# EAGLE board USBPOVToy.v1a (EAGLE 5.11)
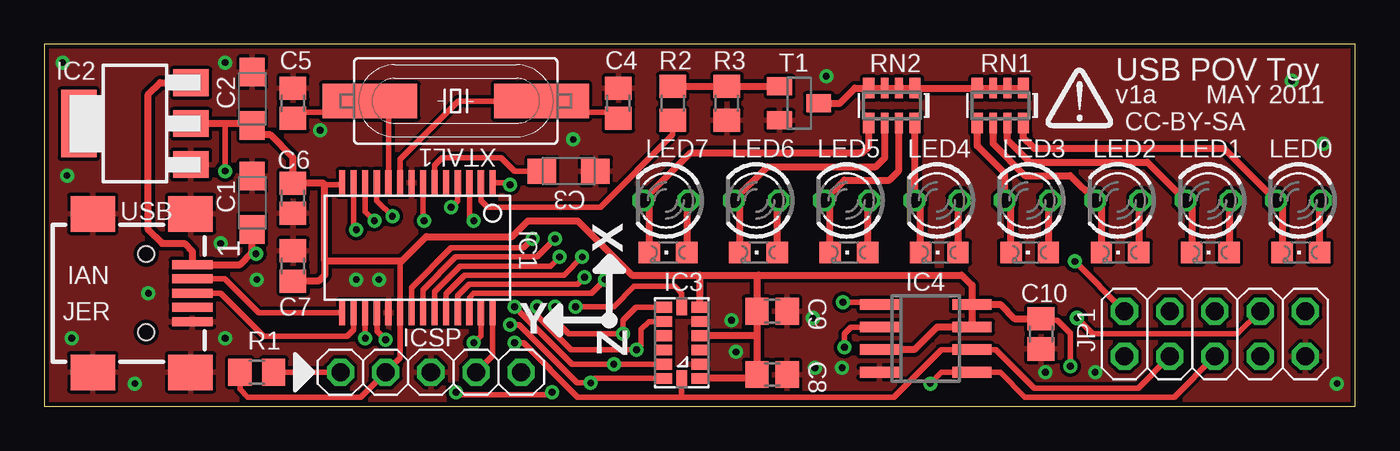
[diagram p0: board, top side]
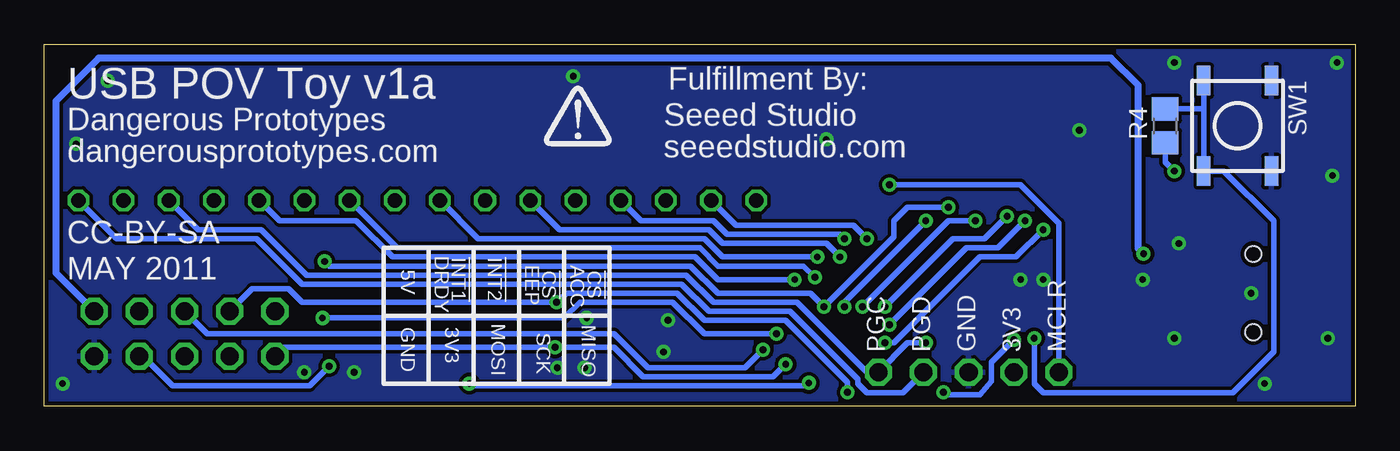
[diagram p1: board, bottom side, seen from below]

Size 73.66 x 20.32 mm. Coordinates in mm from the lower left corner, seen from the top.
Outline: 0,0 73.66,0 73.66,20.32 0,20.32 0,0
Copper layers (1*16): Top 0.035mm / dielectric 1.5mm / Bottom 0.035mm
Design rules "default *": minimum track width 12mil, minimum drill 15mil, track to track 8mil, track to pad 8mil, pad to pad 6mil, via to via 8mil, smd to smd 6mil, copper to edge 10mil, drill to drill 8mil, minimum pad ring 8mil, minimum via ring 8mil, stop-mask expansion 4mil, vias tented up to drill 25mil, thermal gap 8mil

## Footprints (pad centres in the part's own frame; a part is rotated, then mirrored left to right if it is on the bottom)
SMC_A = smd 1.6 x 1.4: + -1.5,0; - 1.5,0
C805 = smd 1.3 x 1.5: 1 -0.85,0; 2 0.85,0
SSOP28 = smd 0.348 x 1.397: 1 -4.225,-3.656; 2 -3.575,-3.656; 3 -2.925,-3.656; 4 -2.275,-3.656; 5 -1.625,-3.656; 6 -0.975,-3.656; 7 -0.325,-3.656; 8 0.325,-3.656; 9 0.975,-3.656; 10 1.625,-3.656; 11 2.275,-3.656; 12 2.925,-3.656; 13 3.575,-3.656; 14 4.225,-3.656; 15 4.225,3.656; 16 3.575,3.656; 17 2.925,3.656; 18 2.275,3.656; 19 1.625,3.656; 20 0.975,3.656; 21 0.325,3.656; 22 -0.325,3.656; 23 -0.975,3.656; 24 -1.625,3.656; 25 -2.275,3.656; 26 -2.925,3.656; 27 -3.575,3.656; 28 -4.225,3.656
SOT223 = smd 1.5 x 2: 1 -2.3,-3.15; 2 0,-3.15; 3 2.3,-3.15 | smd 3.8 x 2: 4 0,3.15
LGA-14 = smd 0.6 x 0.9: 1 -2,-1; 2 -1.2,-1; 3 -0.4,-1; 4 0.4,-1; 5 1.2,-1; 6 2,-1; 8 2,1; 9 1.2,1; 10 0.4,1; 11 -0.4,1; 12 -1.2,1; 13 -2,1 | smd 0.9 x 0.6: 7 2,0; 14 -2,0
SO-08 = smd 0.6 x 2.2: 1 -1.905,-2.6; 2 -0.635,-2.6; 3 0.635,-2.6; 4 1.905,-2.6; 5 1.905,2.6; 6 0.635,2.6; 7 -0.635,2.6; 8 -1.905,2.6
1X05 = drill 1.016 octagon: 1 -5.08,0; 2 -2.54,0; 3 0,0; 4 2.54,0; 5 5.08,0
2X05 = drill 1.016 octagon: 1 -5.08,-1.27; 2 -5.08,1.27; 3 -2.54,-1.27; 4 -2.54,1.27; 5 0,-1.27; 6 0,1.27; 7 2.54,-1.27; 8 2.54,1.27; 9 5.08,-1.27; 10 5.08,1.27
LED-3MM = drill 0.813 octagon: A -1.27,0; K 1.27,0
LED-805 = smd 1.2 x 1.2: A 0,-1.05; C 0,1.05
R805 = smd 1.3 x 1.5: 1 -0.95,0; 2 0.95,0
RN8P-4R-CRA06S = smd 0.63 x 1.15: 1 -1.295,-0.975; 4 1.295,-0.975; 5 1.295,0.975; 8 -1.295,0.975 | smd 0.44 x 1.15: 2 -0.4,-0.975; 3 0.4,-0.975; 6 0.4,0.975; 7 -0.4,0.975
TACT_SWITCH_SMALL = smd 1.651 x 0.762: 1 -2.54,1.905; 2 2.54,1.905; 3 -2.54,-1.905; 4 2.54,-1.905
SOT23-BEC = smd 1 x 1.4: B -0.95,-1.1; C 0,1.1; E 0.95,-1.1
CONN_USB_MINI-B = smd 2 x 2.5: BODY@1 -4.45,2.5; BODY@2 4.45,2.5; BODY@3 4.45,-3; BODY@4 -4.45,-3 | smd 0.5 x 2.3: D+ 0,2.6; D- -0.8,2.6; GND 1.6,2.6; P4 0.8,2.6; VUSB -1.6,2.6 | hole 0.9: -2.2,0; 2.2,0
HC-49U = smd 5.334 x 1.93: 1 -4.826,0; 2 4.826,0

## Placement (x,y rotation side)
C1  10uF  [SMC_A]  11.68,11.43 90 top
C2  10uF  [SMC_A]  11.68,17.27 90 top
C3  10uF  [SMC_A]  29.46,13.21 0 top
C4  [C805]  32.26,17.02 90 top
C5  [C805]  13.97,17.02 90 top
C6  0.47uF  [C805]  13.97,11.68 270 top
C7  0.1uF  [C805]  13.97,7.87 90 top
C8  0.1uF  [C805]  40.89,1.78 0 top
C9  0.1uF  [C805]  40.89,5.33 0 top
C10  0.1uF  [C805]  56.01,4.06 270 top
IC1  PIC18FJ2X50SSOP  [SSOP28]  20.95,8.89 180 top
IC2  [SOT223]  5.08,15.88 90 top
IC3  MMA7455L  [LGA-14]  35.81,3.56 90 top
IC4  25AA080SN  [SO-08]  49.53,3.81 270 top
ICSP  [1X05]  21.72,1.91 0 top
JP1  [2X05]  65.79,4.06 0 top
LED0  [LED-3MM]  70.48,11.56 180 top
LED1  [LED-3MM]  65.41,11.56 180 top
LED2  [LED-3MM]  60.33,11.56 180 top
LED3  [LED-3MM]  55.24,11.56 180 top
LED4  [LED-3MM]  50.16,11.56 180 top
LED5  [LED-3MM]  45.09,11.56 180 top
LED6  [LED-3MM]  40.01,11.56 180 top
LED7  [LED-3MM]  34.92,11.56 180 top
LED8  [LED-805]  35.05,8.64 90 top
LED9  [LED-805]  40.13,8.64 90 top
LED10  [LED-805]  45.21,8.64 90 top
LED11  [LED-805]  50.29,8.64 90 top
LED12  [LED-805]  55.37,8.64 90 top
LED13  [LED-805]  60.45,8.64 90 top
LED14  [LED-805]  65.53,8.64 90 top
LED15  [LED-805]  70.61,8.64 90 top
R1  10k  [R805]  11.94,1.91 180 top
R2  1k  [R805]  35.31,17.02 270 top
R3  10k  [R805]  38.35,17.02 270 top
R4  10k  [R805]  10.67,15.75 90 bottom
RN1  [RN8P-4R-CRA06S]  53.72,16.89 180 top
RN2  [RN8P-4R-CRA06S]  47.62,16.89 180 top
SW1  [TACT_SWITCH_SMALL]  6.6,15.75 270 bottom
T1  [SOT23-BEC]  42.42,17.02 270 top
U$1  [DP_LOGO]  58.17,16.26 0 top
U$2  [DP_LOGO]  43.69,15.24 0 bottom
USB  CONN_USB  [CONN_USB_MINI-B]  5.71,6.35 270 top
XTAL1  20MHz  [HC-49U]  23.11,17.14 180 top

## Library data of the parts
C1-C10 IC2 LED0 LED1-LED15 R1-R4 RN1 RN2 SW1 T1 U$1 U$2 USB XTAL1 = dp_devices
IC1 = dp_devices; PIC18FJ2X50: PIC18FJ2X50
IC3 = jer_eagle
IC4 = microchip
ICSP = pinhead - Copy
JP1 = pinhead

## Nets
!MCLR: IC1.1 ICSP.1 R1.1
+3V3: C2.+ C6.1 C7.1 C8.1 C9.1 C10.1 IC1.14 IC1.20 IC2.2 IC3.1 IC3.4 IC3.6 IC4.3 IC4.7 IC4.8 ICSP.2 JP1.7 R1.2 R4.1
+5V: C1.+ IC2.3 JP1.10 USB.VUSB
D+: IC1.16 USB.D+
D-: IC1.15 USB.D-
GND: C1.- C2.- C3.- C4.2 C5.2 C6.2 C7.2 C8.2 C9.2 C10.2 IC1.8 IC1.19 IC2.1 IC3.2 IC3.5 IC4.4 ICSP.3 JP1.9 R3.2 SW1.1 SW1.2 T1.E USB.BODY@1 USB.BODY@2 USB.BODY@3 USB.BODY@4 USB.GND
N$1: C4.1 IC1.9 XTAL1.1
N$2: LED0.K LED15.C RN1.8
N$3: LED1.K LED14.C RN1.7
N$4: LED2.K LED13.C RN1.6
N$5: LED3.K LED12.C RN1.5
N$6: LED4.K LED11.C RN2.8
N$7: LED5.K LED10.C RN2.7
N$8: LED6.K LED9.C RN2.6
N$9: LED7.K LED8.C RN2.5
N$10: C3.+ IC1.6
N$12: C5.1 IC1.10 XTAL1.2
N$17: RN1.1 RN1.2 RN1.3 RN1.4 RN2.1 RN2.2 RN2.3 RN2.4 T1.C
N$18: R2.1 R3.1 T1.B
RA0: IC1.2 R2.2
RA1: IC1.3 IC3.8 JP1.8
RA2: IC1.4 IC3.7 JP1.2
RA3: IC1.5
RA5: IC1.7 IC3.9 JP1.6
RB0: IC1.21 LED7.A LED8.A
RB1: IC1.22 LED6.A LED9.A
RB2: IC1.23 LED5.A LED10.A
RB3: IC1.24 LED4.A LED11.A
RB4: IC1.25 LED3.A LED12.A
RB5: IC1.26 LED2.A LED13.A
RB6: IC1.27 ICSP.5 LED1.A LED14.A
RB7: IC1.28 ICSP.4 LED0.A LED15.A
RC0: IC1.11 IC3.12 IC4.2 JP1.1
RC1: IC1.12 IC3.13 IC4.5 JP1.5
RC2: IC1.13 IC3.14 IC4.6 JP1.3
RC6: IC1.17 R4.2 SW1.3 SW1.4
RC7: IC1.18 IC4.1 JP1.4

## Tracks (layer width: path | path; a pad name or v marks a point on that pad's centre or on a via)
!MCLR  (via drill 0.38)
  Top 0.305: R1.1 ICSP.1 | v26.16,12.45 26.06,12.55 IC1.1
  Bottom 0.305: v26.16,12.45 18.8,12.45 16.64,10.29 ICSP.1
+3V3  (via drill 0.38)
  Top 0.305: 15.75,12.45 16.63,12.45 IC1.14 | R1.2 10.99,0.95 11.43,0.51 17.78,0.51 ICSP.2 19.98,2.71 IC1.20 19.98,8.04 20.07,8.13 | 10.16,15.88 v10.16,13.21 | v57.66,2.23 57.66,4.09 56.92,4.83 56.19,4.83 C10.1
  Top 0.406: IC2.2 10.16,15.88 11.2,15.88 C2.+ 11.43,15.49 11.68,15.24 12.7,15.24 13.97,13.97 C6.1 15.66,12.53 15.75,12.45 15.75,8.13 | C7.1 15.41,7.02 15.75,7.37 15.75,8.13 | IC4.8 IC4.7 50.16,4.45 48.9,3.17 IC4.3 | C10.1 54.52,4.91 53.72,5.71 IC4.8 | 36.83,7.37 33.02,7.37 29.97,10.41 27.18,10.41 26.29,9.53 21.46,9.53 20.07,8.13 15.75,8.13 | 36.83,7.37 40.13,7.37 | 40.13,7.37 51.56,7.37 52.13,6.8 IC4.8 | IC3.6 36.81,7.35 36.83,7.37 | 40.13,7.37 40.04,7.28 C9.1 40.04,3.81 | 40.04,3.81 C8.1 39.82,1.56 IC3.1 | IC3.4 39.9,3.96 40.04,3.81
  Bottom 0.305: R4.1 10.67,13.72 v10.16,13.21 | JP1.7 68.1,2.79 66.45,1.14 58.75,1.14 v57.66,2.23
+5V  (via drill 0.38)
  Top 0.305: v11.89,8.56 11.86,8.56 11.68,8.64
  Top 0.406: C1.+ 11.68,8.64 11,7.95 USB.VUSB 8.31,8.7 7.87,9.14 6.6,9.14 5.84,9.91 5.84,17.53 6.49,18.18 IC2.3
  Bottom 0.406: JP1.10 73.03,7.49 73.03,17.14 70.61,19.56 13.72,19.56 12.19,18.03 12.19,8.87 v11.89,8.56
D+
  Top 0.305: USB.D+ 9.91,6.35 12.32,3.94 17.02,3.94 17.38,4.3 IC1.16
D-
  Top 0.305: USB.D- 10.12,7.15 12.04,5.23 IC1.15
GND  (via drill 0.38)
  other vias: 38.61,4.83 38.86,3.05 43.18,4.95 17.53,7.11 1.27,12.95 5.08,1.27 1.52,3.81 1.02,19.3 10.16,19.3 18.8,7.11 11.94,7.11 10.16,3.81 9.91,9.14 72.64,1.27 29.72,14.99 56.26,1.91 59.05,1.91 43.31,2.16 44.83,2.16 70.1,18.29 71.88,14.73 43.94,18.54 15.49,15.49 5.84,6.35
  pour Top: 0,0 73.66,0 73.66,20.32 0,20.32
  pour Bottom: 0,0 73.66,0 73.66,20.32 0,20.32
N$1
  Top 0.305: IC1.9 19.98,13.88 23.24,17.14 XTAL1.1 28.57,16.51 32,16.51 32.22,16.3 C4.1
N$2
  Top 0.406: LED15.C 69.56,11.21 LED0.K 66.29,14.48 55.63,14.48 55.02,15.09 RN1.8
N$3
  Top 0.406: LED14.C 64.48,11.21 LED1.K 61.98,13.72 55.37,13.72 54.12,14.97 RN1.7
N$4
  Top 0.406: LED13.C 59.4,11.21 LED2.K 57.66,12.95 55.12,12.95 53.32,14.75 RN1.6
N$5
  Top 0.406: LED12.C 54.32,11.21 LED3.K 53.98,13.08 52.43,14.63 RN1.5
N$6
  Top 0.406: LED11.C 49.24,11.21 LED4.K 48.92,11.58 RN2.8
N$7
  Top 0.406: LED10.C 44.16,11.21 LED5.K 44.96,12.7 47.5,12.7 48.02,13.23 RN2.7
N$8
  Top 0.406: LED9.C 39.08,11.21 LED6.K 40.64,13.46 46.74,13.46 47.23,13.95 RN2.6
N$9
  Top 0.406: LED8.C 34,11.21 LED7.K 36.32,14.22 45.97,14.22 46.33,14.58 RN2.5
N$10
  Top 0.305: IC1.6 21.93,13.55 22.35,13.97 25.65,13.97 26.42,13.21 C3.+
N$12
  Top 0.305: IC1.10 19.33,16.99 19.3,17.02 18.41,17.02 XTAL1.2 17.65,16.51 14.22,16.51 14.01,16.3 C5.1
N$17
  Top 0.406: T1.C 44.7,17.02 45.55,17.87 RN2.4 RN2.3 RN2.2 RN2.1 RN1.4 RN1.3 RN1.2 RN1.1
N$18
  Top 0.406: T1.B R3.1 R2.1
RA0
  Top 0.305: R2.2 35.31,15.24 31.24,11.18 24.89,11.18 24.53,11.54 IC1.2
RA1  (via drill 0.38)
  Top 0.305: v24.13,10.41 23.88,10.67 IC1.3 | v28.7,5.59 28.7,4.83 29.46,4.06 v32.51,4.06 32.51,4.83 33.24,5.56 IC3.8 | JP1.8 67.06,4.06 58.93,4.06 v58.04,4.95
  Bottom 0.305: v28.7,5.59 28.7,5.84 v24.13,10.41 | v32.51,4.06 36.58,4.06 38.35,5.84 43.56,5.84 44.45,4.95 v58.04,4.95
RA2  (via drill 0.38)
  Top 0.305: IC1.4 23.23,11.55 v22.86,11.18 | v29.84,5.59 32,5.59 33.15,6.73 35.43,6.73 35.81,6.35 IC3.7 | v57.91,8.13 JP1.2
  Bottom 0.305: v22.86,11.18 25.15,11.18 25.91,10.41 25.91,9.53 v29.84,5.59 30.61,6.35 35.81,6.35 37.34,7.87 57.66,7.87 v57.91,8.13
RA5  (via drill 0.38)
  Top 0.305: v27.69,5.59 27.69,5.08 29.59,3.17 v33.27,3.17 33.53,3.43 33.53,4.32 33.97,4.76 IC3.9 | IC1.7 21.28,10.47 v21.34,10.41
  Bottom 0.305: v21.34,10.41 22.86,10.41 v27.69,5.59 | JP1.6 64.52,4.06 41.66,4.06 39.75,2.16 34.29,2.16 v33.27,3.17
RB0  (via drill 0.38)
  Top 0.305: IC1.21 20.63,6.66 22.86,8.89 26.92,8.89 v27.43,9.4
  Top 0.406: LED8.A 36.1,11.46 LED7.A
  Bottom 0.305: v27.43,9.4 28.19,10.16 34.8,10.16 LED7.A
RB1  (via drill 0.38)
  Top 0.305: IC1.22 21.28,6.55 23.11,8.38 27.69,8.38 v28.7,9.4
  Top 0.406: LED9.A 41.18,11.46 LED6.A
  Bottom 0.305: v28.7,9.4 28.96,9.65 35.31,9.65 36.07,10.41 40.13,10.41 LED6.A
RB2  (via drill 0.38)
  Top 0.305: IC1.23 21.93,6.44 23.37,7.87 28.45,7.87 v28.96,8.38
  Top 0.406: LED10.A 46.26,11.46 LED5.A
  Bottom 0.305: v28.96,8.38 29.72,9.14 35.56,9.14 36.32,9.91 44.7,9.91 LED5.A
RB3  (via drill 0.38)
  Top 0.305: IC1.24 22.58,6.32 23.62,7.37 29.21,7.37 v30.23,8.38
  Top 0.406: LED11.A 51.34,11.46 LED4.A
  Bottom 0.305: v30.23,8.38 35.56,8.38 36.58,9.4 49.28,9.4 LED4.A
RB4  (via drill 0.38)
  Top 0.305: IC1.25 23.23,6.21 23.88,6.86 29.97,6.86 v30.35,7.24
  Top 0.406: LED12.A 56.42,11.46 LED3.A
  Bottom 0.305: v30.35,7.24 30.99,7.87 35.81,7.87 36.83,8.89 53.85,8.89 LED3.A
RB5  (via drill 0.38)
  Top 0.305: IC1.26 23.88,6.1 24.13,6.35 30.73,6.35 v31.5,7.11
  Top 0.406: LED13.A 61.5,11.46 LED2.A
  Bottom 0.305: LED2.A 60.45,10.41 56.13,10.41 54.1,8.38 37.08,8.38 35.81,7.11 v31.5,7.11
RB6  (via drill 0.38)
  Top 0.305: IC1.27 24.53,3.96 v24.13,3.56
  Top 0.406: LED14.A 66.58,11.46 LED1.A
  Bottom 0.305: v24.13,3.56 25.15,3.56 ICSP.5 27.43,1.91 31.37,5.84 36.07,5.84 37.59,7.37 58.93,7.37 61.47,9.91 65.02,9.91 LED1.A
RB7
  Top 0.305: IC1.28 25.18,2.83 ICSP.4
  Top 0.406: LED15.A 71.66,11.46 LED0.A
  Bottom 0.305: ICSP.4 25.4,0.76 27.43,0.76 27.94,1.27 27.94,1.52 31.75,5.33 36.32,5.33 37.85,6.86 59.18,6.86 61.72,9.4 69.6,9.4 LED0.A
RC0  (via drill 0.38)
  Top 0.305: v19.56,10.67 18.68,11.55 IC1.11 | IC3.12 v32,2.36 29.65,2.36 v26.42,5.59 | v44.96,3.3 44.96,4.06 45.34,4.45 IC4.2
  Bottom 0.305: v19.56,10.67 20.83,9.4 22.61,9.4 v26.42,5.59 | v32,2.36 32.71,1.65 40.01,1.65 41.66,3.3 v44.96,3.3 60.2,3.3 JP1.1
RC1  (via drill 0.38)
  Top 0.305: v18.54,10.41 18.03,10.93 IC1.12 | v26.16,4.57 26.67,4.57 29.94,1.3 v30.7,1.3 30.96,1.56 IC3.13 | v49.78,1.27 50.42,1.91 IC4.5 53.72,1.91 55.12,0.51 63.5,0.51 JP1.5
  Bottom 0.305: v18.54,10.41 20.07,8.89 21.84,8.89 v26.16,4.57 | v30.7,1.3 30.86,1.14 49.66,1.14 v49.78,1.27
RC2  (via drill 0.38)
  Top 0.305: v26.42,3.56 26.92,3.56 29.97,0.51 35.81,0.51 | v17.53,9.91 17.38,10.01 IC1.13 | 35.81,0.51 47.75,0.51 50.42,3.17 IC4.6 53.47,3.17 55.63,1.02 61.47,1.02 JP1.3 | 35.81,0.51 IC3.14
  Bottom 0.305: v26.42,3.56 25.91,3.56 21.08,8.38 19.05,8.38 v17.53,9.91
RC6  (via drill 0.38)
  Top 0.305: IC1.17 18.03,3.56 v18.03,3.81
  Bottom 0.305: 8.51,16.76 SW1.4 7.37,13.21 4.57,10.41 4.57,3.05 6.86,0.76 17.53,0.76 18.03,1.27 v18.03,3.81 | 8.51,16.76 SW1.3 | R4.2 8.57,16.7 8.51,16.76
RC7  (via drill 0.38)
  Top 0.305: v19.18,3.73 18.69,4.22 18.69,5.23 IC1.18 | IC4.1 46.91,5.71 46.79,5.84 v44.88,5.84 | v28.52,0.79 28.47,0.79 28.32,0.64 23.29,0.64 v23.14,0.79
  Bottom 0.305: v23.14,0.79 22.99,0.64 21.08,0.64 20.45,1.4 20.45,2.46 v19.18,3.73 | JP1.4 61.98,6.6 59.94,6.6 59.18,5.84 v44.88,5.84 44.83,5.84 44.32,6.35 38.1,6.35 36.58,4.83 32,4.83 28.52,1.35 v28.52,0.79

## Text on the board
tNames: USB POV Toy | v1a | MAY 2011 | CC-BY-SA | X | IAN | JER | Y | Z
bNames: Fulfillment By: | USB POV Toy v1a | Seeed Studio | Dangerous Prototypes | seeedstudio.com | dangerousprototypes.com | CC-BY-SA | !CS | ACC | !CS | EEP | !INT2 | !INT1 | DRDY | 5V | MAY 2011 | MISO | MOSI | SCK | 3V3 | GND | MCLR | 3V3 | GND | PGD | PGC